# Altium PCB DSP_Control.PcbDoc (part 2 of 2)
Units mm, origin at the board's own origin, x right, y up, seen from the top; angles counter-clockwise.
Board outline 100 x 70 mm, 4 copper layers (Top Layer, GND, PWR, Bottom Layer), stack 0.603 mm thick; 225 components, 118 nets, 552 pads, 173 vias.
Unrouted connection lines stored in the file: 3.
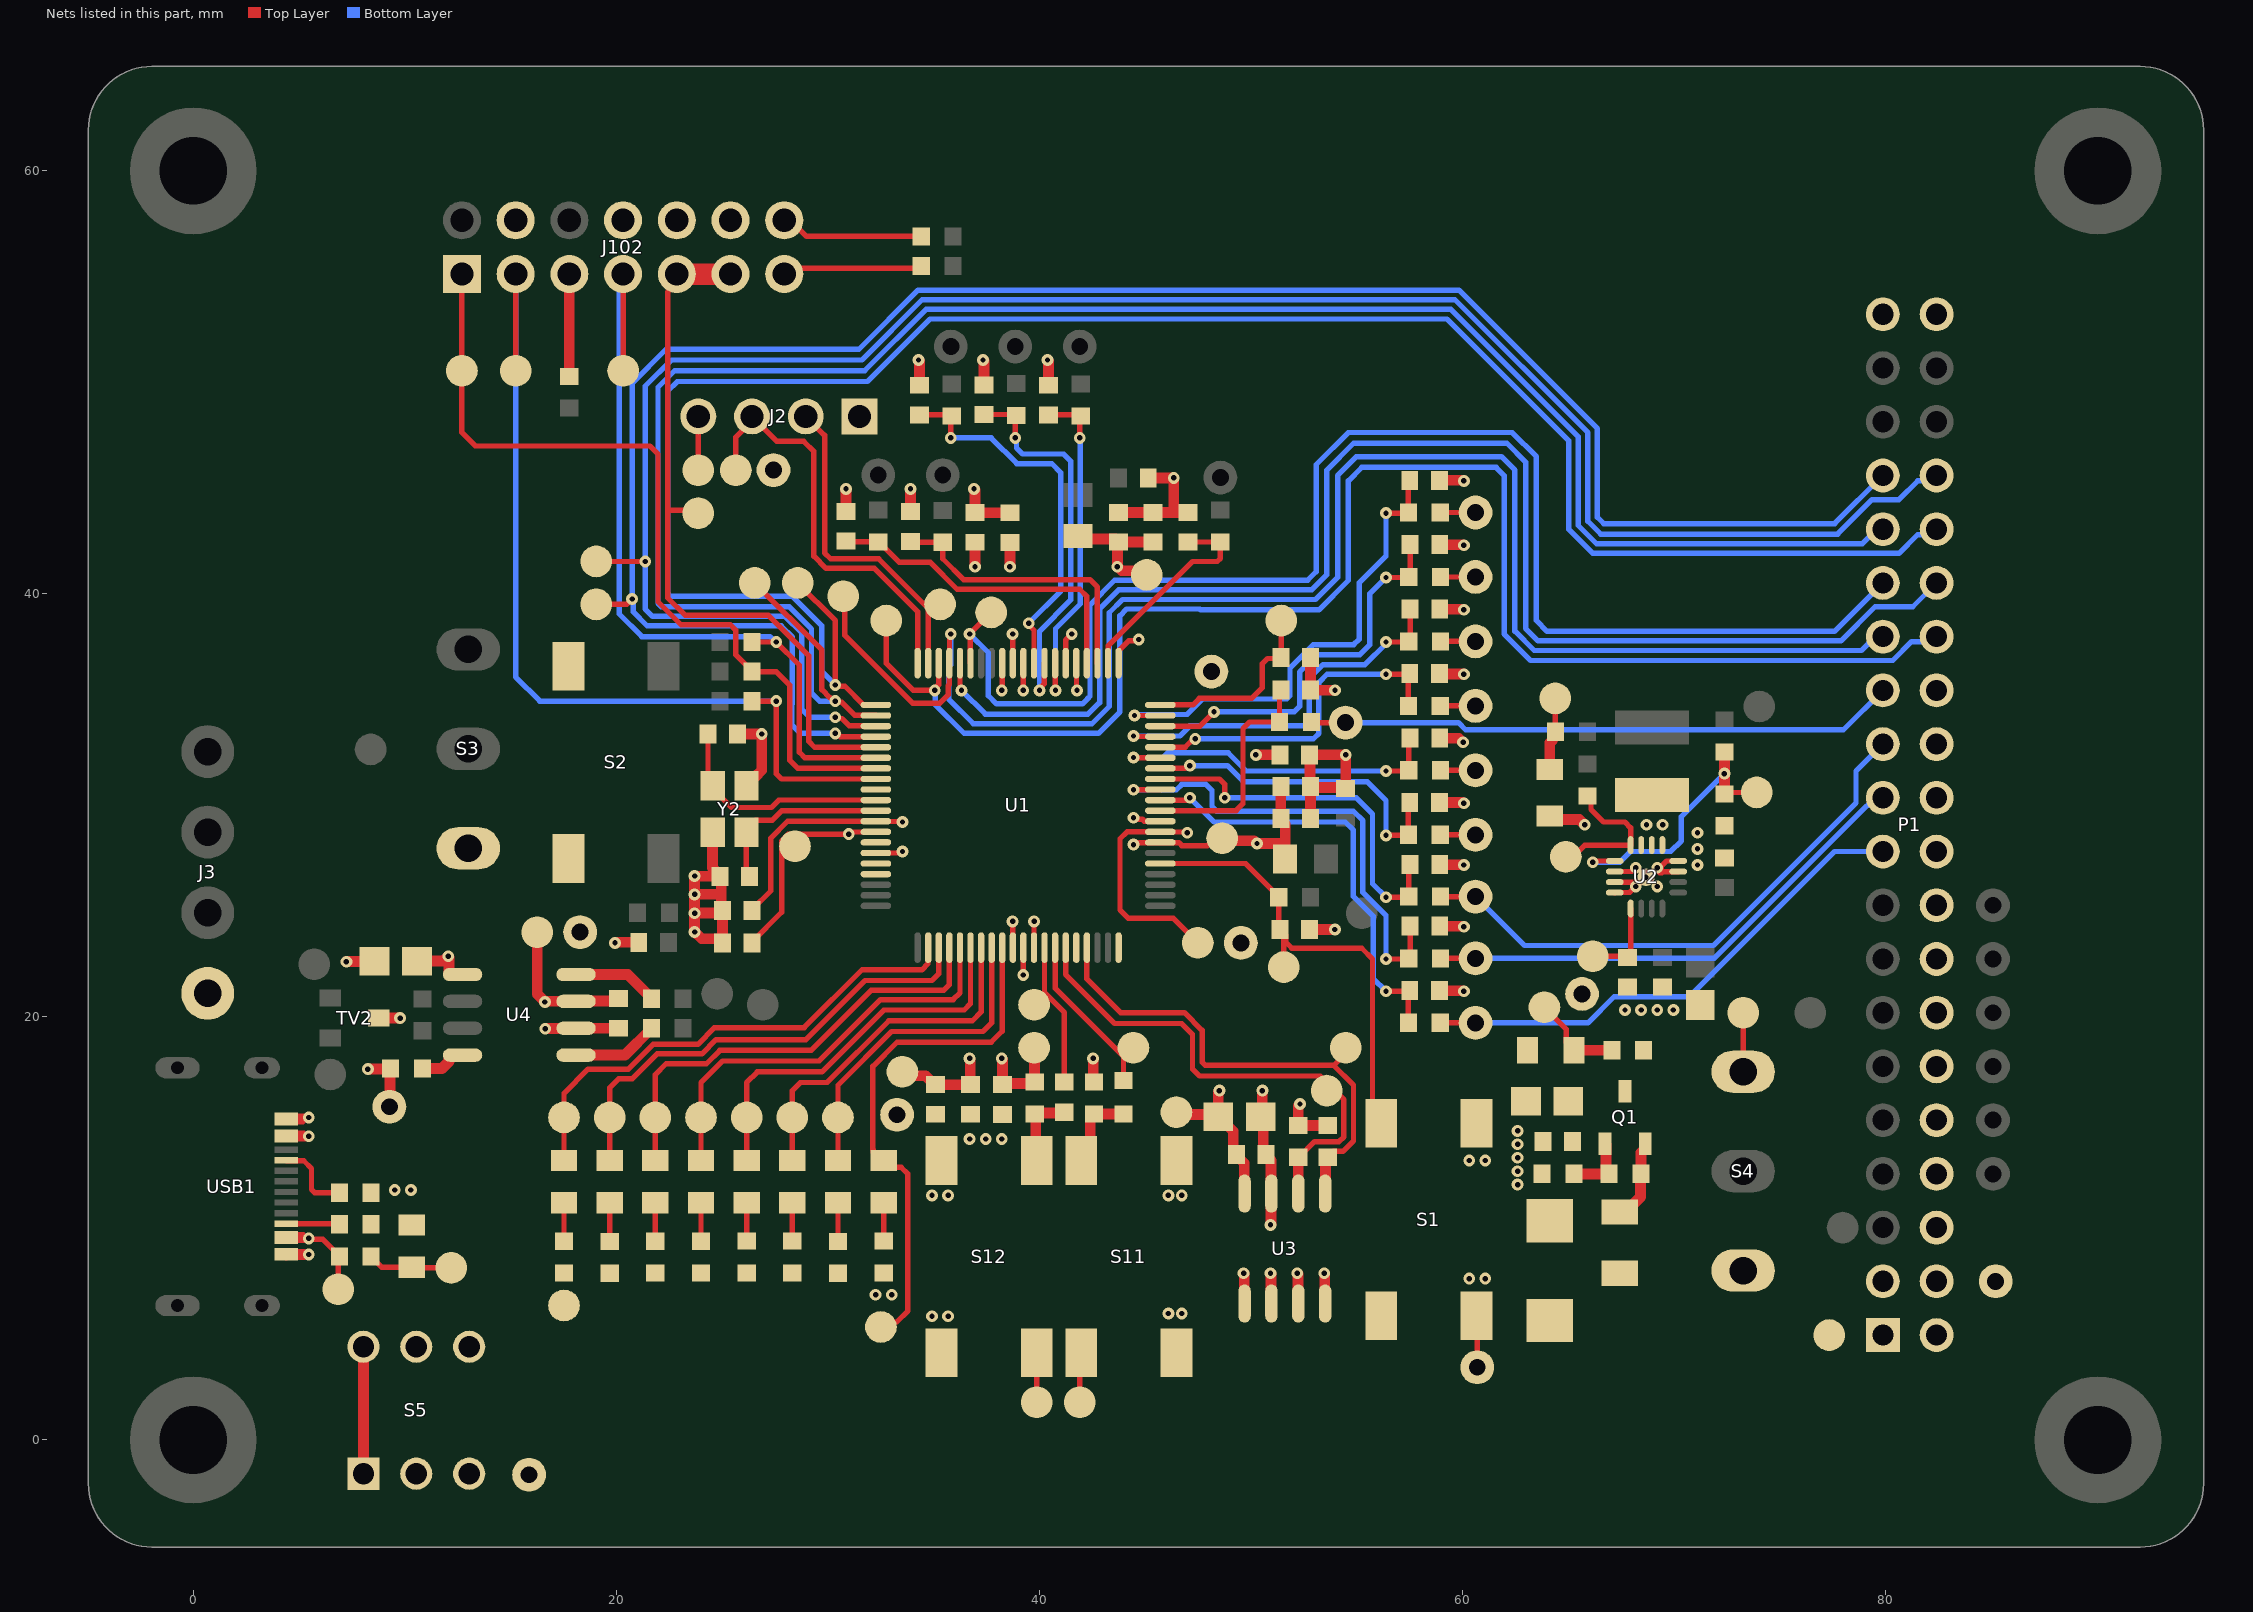
[diagram p4: the nets of this part, all layers, seen from the top]

## Via types
v1: diameter 0.559, hole 0.254, Top Layer to Bottom Layer, 173 vias

## Nets (pads, with @x,y where several pads share a name; then routed paths per layer and width w, separated by ;. In a path a pad name is that pad's centre, name@x,y a point inside that pad or via, vN(x,y) a via of type N, cw(c..) or ccw(c..) an arc to the next point about the centre after c; other vN are vias at no path point) (continued)
GND: C9.1 C10.1 C11.1 C12.1 C13.1 C14.2 C15.2 C16.2 C17.2 C18.2 C19.2 C20.2 C21.2 C22.2 C23.2 C24.2 C25.2 C26.2 C27.2 C28.2 C29.2 C30.2 C31.2 C32.2 C33.2 C34.2 C35.2 C36.2 C37.2 C38.2 C39.2 C40.2 C41.2 C42.2 C43.2 C44.2 C45.2 C46.1 C47.2 C48.2 C49.2 C50.2 C51.2 C52.2 C53.2 D2.1 D3.1 D4.1 J2.1 J3.1 J102.4 J102.8 J102.10 J102.12 P1.1 P1.2 P1.4 P1.6 P1.8 P1.10 P1.12 P1.14 P1.16 P1.18 P1.20 P1.22 P1.24 P1.26 P1.39 P1.40 R65.1 R72.2 R74.1 R87.2 R88.1 S1.1 S1.2 S2.3 S2.4 S3.3 S11.3 S11.4 S12.3 S12.4 TP9.1 TP16.1 TP25.1 TP97.1 TP104.1 TP153.1 TP157.1 TP158.1 TP159.1 TV1.2 TV2.3 U1.9 U1.21 U1.25 U1.30 U1.55 U1.70 U2.6 U2.7 U2.8 U2.15 U2.16 U2.17 U3.1 U3.2 U3.3 U3.4 U3.7 U4.2 USB1.A1 USB1.A12 USB1.B1 USB1.B12 Y2.2 Y2.4 | length 99.7
  Top Layer w0.254: USB1.A12@4.403,8.621 4.425,8.644 5.257,8.644 v1@5.382,8.768 ; USB1.B1@4.403,8.92 4.425,8.898 5.252,8.898 v1@5.382,8.768 ; USB1.B12@4.403,15.022 4.425,15.044 5.181,15.044 5.382,15.245 v1(5.464,15.245) 5.411,15.298 4.425,15.298 USB1.A1@4.403,15.321 ; v1(5.464,8.768) v1@5.382,8.768 ; U1.55@32.275,27.75 33.381,27.75 33.449,27.818 v1(33.531,27.818) ; v1(38.738,24.516) 38.744,24.51 38.744,23.281 U1.70@38.75,23.275 ; v1(39.246,35.438) 39.248,35.44 39.248,36.723 U1.30@39.25,36.725 ; U1.25@41.75,36.725 41.759,36.716 41.759,35.465 v1(41.786,35.438) ; U1.21@43.75,36.725 43.765,36.74 43.765,37.315 44.238,37.788 44.646,37.788 v1(44.704,37.846) ; v1(44.453,29.412) 44.511,29.353 44.872,29.353 44.967,29.259 45.716,29.259 U1.9@45.725,29.25 ; S1.2@60.673,5.87 60.709,5.834 TP153.1@60.709,3.434 ; U2.8@67.209,25.875 67.214,25.88 67.915,25.88 v1(68.202,26.167) 68.227,26.167 68.662,26.601 v1(68.687,26.601) ; U2.7@67.209,26.373 68.154,26.373 v1@68.202,26.421 ; U2.6@67.209,26.873 68.014,26.873 68.056,26.915 68.186,26.915 68.202,26.931 v1(68.202,27.056) ; U2.15@70.209,26.873 70.204,26.868 69.494,26.868 69.427,26.802 69.345,26.802 69.403,26.86 69.403,27.114 69.658,27.369 70.204,27.369 U2.16@70.209,27.373
  Top Layer w0.508: v1(7.242,22.611) 7.252,22.621 8.555,22.621 C50.2@8.573,22.639 ; v1(8.258,17.531) 8.268,17.541 R72.2@9.309,17.541 ; TV2.3@8.774,19.944 v1(9.782,19.944) ; TP97.1@9.274,15.753 9.301,15.78 9.301,17.532 R72.2@9.309,17.541 ; R72.2@9.328,17.559 R72.2@9.309,17.541 ; v1(16.64,19.436) 16.65,19.446 18.08,19.446 U4.2@18.098,19.464 C51.2@20.115,19.464 ; v1(19.942,23.5) 19.956,23.5 19.984,23.528 C43.2@21.065,23.528 ; Y2.2@24.554,28.722 24.554,27.05 24.907,26.697 24.865,26.654 23.71,26.654 v1(23.703,26.661) v1(23.703,25.793) ; C42.2@24.962,26.592 24.962,25.835 ; C11.1@25.019,23.5 25.018,23.501 C11.1@25.018,23.551 ; C41.2@25.738,33.378 v1(26.878,33.378) ; Y2.4@26.155,30.922 26.155,31.046 26.476,31.368 26.581,31.368 26.878,31.665 v1@26.878,33.364 ; C29.2@30.864,43.904 v1(30.864,44.963) ; C36.2@33.912,43.886 v1(33.912,44.963) ; v1(34.293,51.059) 34.293,51.045 34.339,50.999 C30.2@34.339,49.865 ; v1(36.914,44.967) 36.914,44.953 36.96,44.907 C21.2@36.96,43.84 36.961,43.839 38.61,43.839 C12.1@38.611,43.838 ; v1(37.341,51.059) 37.341,51.045 37.387,50.999 C37.2@37.387,49.883 ; v1(40.389,51.059) 40.389,51.045 40.435,50.999 C27.2@40.435,49.865 ; C15.2@43.737,43.851 C14.2@45.388,43.851 46.213,43.851 ; C16.2@45.154,45.471 45.161,45.478 46.351,45.478 v1(46.358,45.485) 46.358,43.995 46.213,43.851 ; C31.2@47.039,43.851 46.213,43.851 ; v1(49.66,7.879) 49.66,7.865 49.691,7.834 49.691,6.464 U3.1@49.706,6.449 ; v1(50.549,16.515) 50.539,16.505 50.539,15.339 C49.2@50.468,15.268 50.595,15.141 50.595,13.622 C48.2@50.722,13.495 50.722,13.445 50.961,13.207 U3.7@50.961,11.663 ; v1(50.93,10.165) 50.93,10.179 50.961,10.21 U3.7@50.961,11.663 ; v1(50.935,7.884) 50.935,7.87 50.961,7.844 50.961,6.464 U3.2@50.976,6.449 ; U3.7@50.976,11.648 U3.7@50.961,11.663 ; v1(52.2,7.879) 52.2,7.865 52.231,7.834 52.231,6.464 U3.3@52.246,6.449 ; C17.2@52.774,24.135 v1(53.978,24.135) ; C19.2@52.82,29.37 C20.2@52.82,30.894 ; C24.2@52.82,36.99 C28.2@52.82,35.466 52.837,35.449 53.97,35.449 v1(53.98,35.44) ; v1(53.47,7.879) 53.47,7.865 53.501,7.834 53.501,6.464 U3.4@53.516,6.449 ; C40.2@58.916,21.242 60.032,21.242 60.06,21.214 v1(60.074,21.214) ; C32.2@58.916,30.132 60.032,30.132 60.06,30.104 v1(60.074,30.104) ; C38.2@58.916,36.228 58.934,36.21 60.064,36.21 v1(60.074,36.2) ; C25.2@58.916,45.372 60.032,45.372 60.06,45.344 v1(60.074,45.344) ; C34.2@58.934,24.29 60.032,24.29 60.06,24.262 v1(60.074,24.262) ; C26.2@58.934,27.211 58.952,27.193 60.064,27.193 v1(60.074,27.183) ; C39.2@58.934,33.18 59.829,33.18 60.026,32.983 v1(60.039,32.983) ; C35.2@58.934,39.276 60.032,39.276 60.06,39.248 v1(60.074,39.248) ; C33.2@58.934,42.324 60.032,42.324 60.06,42.296 v1(60.074,42.296) ; D2.1@64.138,29.505 64.304,29.338 65.525,29.338 65.775,29.088 v1(65.789,29.088) ; v1(23.703,24.904) 23.713,24.914 24.907,24.914 C22.2@25.017,25.024 ; v1(23.703,24.904) v1(23.703,25.793) ; v1(23.703,24.904) v1(23.703,24.015) 23.717,24.015 24.037,23.696 24.873,23.696 C11.1@25.018,23.551 ; v1(23.703,25.793) 24.92,25.793 24.962,25.835 ; 24.962,25.835 24.962,25.079 C22.2@25.017,25.024 ; C22.2@25.017,25.024 25.018,25.023 C11.1@25.018,23.551 ; C20.2@52.82,30.894 52.865,30.85 54.442,30.85 C18.2@54.486,30.805 54.489,30.808 54.489,32.387 v1(54.493,32.39) C13.1@52.771,32.39 52.796,32.366 52.796,30.918 C20.2@52.82,30.894
  other v1: 34.928,5.847 35.69,5.847 46.104,5.974 46.739,5.974 60.328,7.625 61.09,7.625 34.928,11.562 35.69,11.562 46.104,11.562 46.739,11.562 9.528,11.816 10.29,11.816 62.614,12.07 62.614,12.705 60.328,13.213 61.09,13.213 62.614,13.34 62.614,13.975 36.706,14.229 37.468,14.229 38.23,14.229 62.614,14.61 67.694,20.325 68.456,20.325 69.218,20.325 69.98,20.325 69.218,26.167 69.218,27.056 71.123,27.183 71.123,27.945 71.123,28.707
GPIO0: LED1.1 TP145.1 U1.63 | length 22.5
  Top Layer w0.254: LED1.1@19.688,13.213 TP145.1@19.688,15.245 19.688,16.642 20.123,17.077 20.761,17.077 21.936,18.251 24.044,18.251 24.721,18.928 28.966,18.928 31.76,21.722 34.928,21.722 35.241,22.035 35.241,23.266 U1.63@35.25,23.275
GPIO1: LED0.1 TP144.1 U1.62 | length 23.7
  Top Layer w0.254: LED0.1@17.529,13.213 TP144.1@17.529,15.245 17.529,16.388 18.672,17.531 20.573,17.531 21.748,18.705 23.856,18.705 24.641,19.49 28.886,19.49 31.626,22.23 32.769,22.23 32.776,22.223 34.448,22.223 34.741,22.517 34.741,23.266 U1.62@34.75,23.275
GPIO5: R85.2 TP30.1 U1.74 | length 7.6
  Top Layer w0.254: U1.74@40.75,23.275 40.75,21.361 43.981,18.13 R85.2@43.981,16.998
GPIO6: U1.80
GPIO7: LED6.1 TP150.1 U1.68 | length 15.6
  Top Layer w0.254: LED6.1@30.483,13.213 TP150.1@30.483,15.245 30.483,16.769 33.023,19.309 37.341,19.309 37.75,19.718 U1.68@37.75,23.275
GPIO10: U1.76
GPIO11: P1.27 TP118.1 U1.37 | length 78.1
  Top Layer w0.254: TP118.1@30.737,39.883 30.81,39.81 30.81,38.032 34.01,34.832 35.306,34.832 35.695,35.221 35.695,35.666 35.75,35.721 U1.37@35.75,36.725 35.759,36.734 35.759,38.047 v1(35.817,38.105)
  Bottom Layer w0.254: v1(35.817,38.105) 35.817,36.654 35.719,36.555 35.719,35.028 36.887,33.86 42.494,33.86 43.31,34.676 43.31,39.107 43.94,39.737 53.063,39.737 54.105,40.779 54.105,45.598 54.994,46.487 61.852,46.487 62.487,45.852 62.487,38.239 63.402,37.324 78.87,37.324 79.524,37.978 P1.27@79.886,37.978
GPIO12: P1.30 U1.36 | length 68.3
  Top Layer w0.254: U1.36@36.25,36.725 36.25,35.595 36.325,35.52 v1(36.325,35.438)
  Bottom Layer w0.254: v1(36.325,35.438) 37.449,34.314 42.306,34.314 42.852,34.86 42.852,39.291 43.752,40.191 52.875,40.191 53.597,40.913 53.597,45.852 54.867,47.122 62.106,47.122 62.995,46.233 62.995,38.373 63.59,37.778 77.908,37.778 79.521,39.391 81.299,39.391 P1.30@82.426,40.518
GPIO13: P1.29 TP120.1 U1.35 | length 68.8
  Top Layer w0.254: U1.35@36.75,36.725 36.741,36.734 36.741,38.07 v1(36.706,38.105) TP120.1@37.722,39.121
  Bottom Layer w0.254: v1(36.706,38.105) 37.595,37.216 37.595,35.184 37.976,34.803 42.04,34.803 42.3,35.063 42.398,35.161 42.398,39.479 43.564,40.645 52.687,40.645 53.089,41.047 53.089,46.106 54.613,47.63 62.36,47.63 63.503,46.487 63.503,38.74 64.011,38.232 77.6,38.232 P1.29@79.886,40.518
GPIO18_X2: C41.1 U1.50 Y2.1 | length 10.9
  Top Layer w0.25: C41.1@24.338,33.378 24.338,31.138 Y2.1@24.554,30.922 24.554,30.797 25.254,30.097 25.254,30.087 25.445,29.897 27.335,29.897 27.687,30.25 U1.50@32.275,30.25
GPIO19_X1: C42.1 U1.51 Y2.3 | length 8.8
  Top Layer w0.254: C42.1@26.307,26.647 26.155,26.799 Y2.3@26.155,28.722 26.155,28.847 26.603,29.295 27.372,29.295 27.827,29.75 U1.51@32.275,29.75
GPIO22: LED5.1 TP149.1 U1.67 | length 16.8
  Top Layer w0.254: LED5.1@28.324,13.213 TP149.1@28.324,15.245 28.324,16.515 28.705,16.896 29.968,16.896 32.889,19.817 36.833,19.817 37.25,20.234 U1.67@37.25,23.275
GPIO23: LED3.1 TP147.1 U1.65 | length 20.2
  Top Layer w0.254: LED3.1@24.006,13.213 TP147.1@24.006,15.245 TP147.1@24.006,15.626 ; TP147.1@24.387,15.626 TP147.1@24.006,15.626 ; U1.65@36.25,23.275 36.25,21.139 35.925,20.814 32.496,20.814 29.594,17.912 25.029,17.912 24.006,16.889 TP147.1@24.006,15.626
GPIO32: U1.49
GPIO33: P1.28 TP119.1 U1.38 | length 74.1
  Top Layer w0.254: TP119.1@32.769,38.74 32.769,36.715 34.046,35.438 v1(35.055,35.438) 35.055,35.52 35.241,35.707 35.241,36.716 U1.38@35.25,36.725
  Bottom Layer w0.254: v1(35.055,35.438) 35.08,35.413 35.08,34.778 36.452,33.406 42.802,33.406 43.81,34.414 43.81,38.965 44.128,39.283 47.593,39.283 47.628,39.248 53.216,39.248 54.613,40.645 54.613,45.344 55.248,45.979 61.598,45.979 61.979,45.598 61.979,38.105 63.233,36.851 80.353,36.851 81.245,37.743 82.191,37.743 P1.28@82.426,37.978
GPIO35: J102.3 R58.1 TP13.1 U1.48 | length 45.8
  Top Layer w0.254: TP13.1@15.243,50.551 J102.3@15.243,55.123 ; R58.1@26.416,34.93 v1(27.562,34.93) 27.562,31.501 27.813,31.25 U1.48@32.275,31.25
  Bottom Layer w0.254: J102.3@15.243,55.123 15.243,36.073 16.386,34.93 v1(27.562,34.93)
GPIO37: J102.7 R59.1 TP14.1 U1.46 | length 39.2
  Top Layer w0.254: TP14.1@20.323,50.551 J102.7@20.323,55.123 ; R59.1@26.416,37.724 v1(27.562,37.724) 28.651,36.635 28.651,32.517 28.918,32.25 U1.46@32.275,32.25
  Bottom Layer w0.254: J102.7@20.323,55.123 20.142,54.942 20.142,39.048 21.212,37.978 27.261,37.978 27.515,37.724 v1(27.562,37.724)
GPIO39: U1.56
GPIO40: LED2.1 TP146.1 U1.64 | length 21.5
  Top Layer w0.254: LED2.1@21.847,13.213 TP146.1@21.847,15.245 21.847,17.277 22.355,17.785 24.26,17.785 24.895,18.42 29.213,18.42 32.061,21.268 35.49,21.268 35.75,21.528 U1.64@35.75,23.275
GPIO41: LED4.1 TP148.1 U1.66 | length 18.5
  Top Layer w0.254: LED4.1@26.165,13.213 TP148.1@26.165,15.245 26.165,16.896 26.673,17.404 29.728,17.404 32.649,20.325 36.452,20.325 36.75,20.623 U1.66@36.75,23.275
GPIO42: U1.57
GPIO43: U1.54
GPIO44: LED7.1 TP151.1 U1.69 | length 25
  Top Layer w0.254: TP151.1@32.515,5.339 32.753,5.577 33.261,5.577 33.785,6.101 33.785,12.578 33.474,12.889 32.966,12.889 LED7.1@32.642,13.213 32.518,13.213 32.144,13.586 32.144,13.725 32.134,13.735 32.134,17.658 33.277,18.801 37.722,18.801 38.25,19.329 U1.69@38.25,23.275
GPIO45: R86.1 TP31.1 U1.73 | length 7.6
  Top Layer w0.254: TP31.1@39.754,20.579 39.972,20.579 40.395,21.001 ; U1.73@40.25,23.275 40.25,21.146 40.395,21.001 ; R86.1@41.187,16.919 41.187,20.21 40.395,21.001
I2CB_SCL: R67.2 TP54.1 U1.75 U3.6 | length 23.9
  Top Layer w0.254: U1.75@41.25,23.275 41.25,22.004 43.564,19.69 46.732,19.69 47.247,19.175 47.247,17.531 47.574,17.204 53.282,17.204 53.842,16.644 54.402,16.084 54.402,14.33 54.174,14.102 53.013,14.102 52.274,13.363 R67.2@52.246,13.363
  Top Layer w0.508: U3.6@52.246,11.648 R67.2@52.246,13.363
I2CB_SDA: R68.2 TP55.1 U1.77 U3.5 | length 24.1
  Top Layer w0.254: U1.77@42.25,23.275 42.25,21.797 43.849,20.198 46.866,20.198 47.701,19.363 47.701,17.861 47.85,17.712 53.924,17.712 ; R68.2@53.643,13.363 53.92,13.64 54.354,13.64 54.856,14.142 54.856,16.78 53.924,17.712 ; TP55.1@54.486,18.547 54.486,18.274 53.924,17.712
  Top Layer w0.508: U3.5@53.516,11.648 53.531,11.663 53.531,13.251 R68.2@53.643,13.363
Iin_FB: P1.23 R14.2 TP39.1 | length 26.7
  Top Layer w0.254: R14.2@58.977,25.687 TP39.1@60.628,25.687
  Bottom Layer w0.254: TP39.1@60.628,25.687 62.942,23.373 71.871,23.373 78.616,30.118 78.616,31.628 P1.23@79.886,32.898
IL_FB: P1.19 R27.2 TP47.1 | length 24.3
  Top Layer w0.254: R27.2@58.959,19.718 TP47.1@60.628,19.718
  Bottom Layer w0.254: TP47.1@60.628,19.718 65.944,19.718 67.186,20.96 70.742,20.96 76.965,27.183 77.6,27.818 P1.19@79.886,27.818
MCU_TCK: J102.9 J102.11 TP15.1 U1.45 | length 34.7
  Top Layer w0.254: J102.9@22.863,55.123 22.863,54.704 22.428,54.269 22.428,43.947 ; TP15.1@23.879,43.82 23.752,43.947 22.428,43.947 ; U1.45@32.275,32.75 29.38,32.75 29.105,33.025 29.105,37.07 27.181,38.994 23.251,38.994 22.428,39.817 22.428,43.82 22.428,43.947
  Top Layer w1.016: J102.9@22.863,55.123 J102.11@25.403,55.123
MCU_TMS: J102.1 R10.1 TP12.1 U1.47 | length 40.5
  Top Layer w0.254: J102.1@12.703,55.123 12.703,47.63 13.338,46.995 21.593,46.995 21.974,46.614 21.974,39.629 23.063,38.54 25.392,38.54 25.641,38.291 25.641,38.121 25.657,38.105 25.657,37.114 26.416,36.355 R10.1@26.416,36.327 27.562,36.327 28.197,35.692 28.197,32.136 28.583,31.75 U1.47@32.275,31.75
NetC24_1: C24.1 TP34.1 U1.20 | length 9.1
  Top Layer w0.254: U1.20@45.725,34.75 47.266,34.75 47.573,35.057 50.041,35.057 50.549,35.565 50.549,36.708 50.788,36.947 51.378,36.947 C24.1@51.42,36.99 51.438,37.008 TP34.1@51.438,38.74
NetC25_1: C25.1 R12.1 U1.19 | length 23.2
  Top Layer w0.254: v1(44.501,34.247) 44.502,34.249 45.724,34.249 U1.19@45.725,34.25 ; v1(56.391,43.82) 57.425,43.82 R12.1@57.453,43.848 57.453,45.308 C25.1@57.516,45.372
  Bottom Layer w0.254: v1(44.501,34.247) 44.549,34.295 46.993,34.295 47.726,35.028 51.698,35.028 51.854,35.184 51.854,36.489 52.962,37.597 54.867,37.597 55.121,37.851 55.121,40.518 56.391,41.788 v1(56.391,43.82)
NetC26_1: C26.1 R14.1 U1.13 | length 17.9
  Top Layer w0.254: U1.13@45.725,31.25 48.514,31.25 48.771,30.993 v1(48.771,30.358) ; v1(56.391,25.659) 57.443,25.659 R14.1@57.471,25.687 57.471,27.147 C26.1@57.534,27.211
  Bottom Layer w0.254: v1(48.771,30.358) 54.994,30.358 55.756,29.596 55.756,26.294 v1(56.391,25.659)
NetC27_1: C27.1 R16.1 U1.27 | length 16.4
  Top Layer w0.254: C27.1@40.435,48.466 R16.1@41.913,48.466 ; U1.27@40.75,36.725 40.759,36.716 40.759,35.449 v1(40.77,35.438) ; v1(41.913,47.376) R16.1@41.913,48.465 ; R16.1@41.959,48.42 R16.1@41.913,48.466
  Bottom Layer w0.254: v1(40.77,35.438) 40.77,38.352 41.938,39.52 41.938,47.351 v1(41.913,47.376)
NetC28_1: C28.1 R18.1 U1.10 | length 11
  Top Layer w0.254: U1.10@45.725,29.75 49.306,29.75 49.635,30.079 49.635,33.635 49.942,33.942 R18.1@51.357,33.942 51.357,35.402 C28.1@51.42,35.466
NetC29_1: C29.1 R20.1 U1.24 | length 15.6
  Top Layer w0.254: C29.1@30.864,42.504 30.91,42.459 R20.1@32.388,42.459 32.416,42.459 33.386,41.489 34.848,41.489 36.117,40.22 41.913,40.22 42.25,39.883 U1.24@42.25,36.725
NetC30_1: C30.1 R22.1 U1.29 | length 18.3
  Top Layer w0.254: C30.1@34.339,48.466 R22.1@35.817,48.466 ; v1(35.817,47.376) R22.1@35.817,48.465 ; R22.1@35.863,48.42 R22.1@35.817,48.466 ; v1(39.5,38.613) 39.5,38.531 39.75,38.281 U1.29@39.75,36.725
  Bottom Layer w0.254: v1(35.817,47.376) 37.722,47.376 38.938,46.16 40.589,46.16 41.024,45.725 41.024,40.137 v1(39.5,38.613)
NetC31_1: C31.1 R24.1 U1.22 | length 10.1
  Top Layer w0.254: U1.22@43.25,36.725 43.259,36.734 43.259,37.544 47.249,41.534 48.414,41.534 48.563,41.683 R24.1@48.563,42.451 C31.1@47.039,42.451
NetC32_1: C32.1 R26.1 U1.14 | length 15.7
  Top Layer w0.254: U1.14@45.725,31.75 46.906,31.75 47.038,31.882 v1(47.12,31.882) ; v1(56.391,28.58) 57.425,28.58 R26.1@57.453,28.608 57.453,30.068 C32.1@57.516,30.132
  Bottom Layer w0.254: v1(47.12,31.882) 48.891,31.882 49.653,31.12 55.502,31.12 56.391,30.231 v1(56.391,28.58)
NetC33_1: C33.1 R13.1 U1.18 | length 18.6
  Top Layer w0.254: U1.18@45.725,33.75 47.591,33.75 v1(48.263,34.422) ; v1(56.391,40.772) 57.443,40.772 R13.1@57.471,40.8 57.534,40.863 C33.1@57.534,42.324
  Bottom Layer w0.254: v1(48.263,34.422) 52.054,34.422 52.308,34.676 52.308,36.301 53.131,37.124 55.156,37.124 55.629,37.597 55.629,40.01 v1(56.391,40.772)
NetC34_1: C34.1 R15.1 U1.12 | length 23
  Top Layer w0.254: v1(44.453,30.739) 44.458,30.744 45.719,30.744 U1.12@45.725,30.75 ; v1(56.391,22.738) 57.443,22.738 R15.1@57.471,22.766 57.534,22.829 C34.1@57.534,24.29
  Bottom Layer w0.254: v1(44.453,30.739) 46.485,30.739 46.739,30.993 47.882,30.993 48.165,30.71 48.165,29.955 48.397,29.723 54.855,29.723 55.302,29.276 55.302,25.89 56.391,24.801 v1(56.391,22.738)
NetC35_1: C35.1 R17.1 U1.17 | length 18.9
  Top Layer w0.254: v1(44.453,33.279) 44.473,33.259 45.716,33.259 U1.17@45.725,33.25 ; v1(56.391,37.724) 57.443,37.724 R17.1@57.471,37.752 57.534,37.815 C35.1@57.534,39.276
  Bottom Layer w0.254: v1(44.453,33.279) 46.643,33.279 47.123,33.758 52.552,33.758 52.762,33.968 52.762,36 53.416,36.654 55.403,36.654 56.391,37.642 v1(56.391,37.724)
NetC36_1: C36.1 R19.1 U1.23 | length 13.8
  Top Layer w0.254: C36.1@33.912,42.486 33.958,42.441 R19.1@35.436,42.441 35.436,41.661 36.423,40.674 42.392,40.674 42.75,40.316 U1.23@42.75,36.725
NetC37_1: C37.1 R21.1 U1.28 | length 18.8
  Top Layer w0.254: C37.1@37.387,48.483 R21.1@38.865,48.483 ; v1(38.865,47.376) R21.1@38.865,48.483 ; R21.1@38.911,48.438 R21.1@38.865,48.483 ; v1(40.008,35.438) 40.008,35.52 40.241,35.754 40.241,36.716 U1.28@40.25,36.725
  Bottom Layer w0.254: v1(38.865,47.376) 38.923,47.318 38.923,46.907 39.217,46.614 41.151,46.614 41.484,46.281 41.484,39.708 40.008,38.232 v1(40.008,35.438)
NetC38_1: C38.1 R23.1 U1.16 | length 16.2
  Top Layer w0.254: U1.16@45.725,32.75 46.898,32.75 47.292,33.144 v1(47.374,33.144) ; v1(56.391,36.2) C38.1@57.488,36.2 ; R23.1@57.453,34.704 57.453,36.164 C38.1@57.488,36.2 ; C38.1@57.516,36.228 C38.1@57.488,36.2
  Bottom Layer w0.254: v1(47.374,33.144) 47.382,33.152 52.962,33.152 53.216,33.406 53.216,35.812 53.604,36.2 v1(56.391,36.2)
NetC39_1: C39.1 R25.1 U1.15 | length 16.3
  Top Layer w0.254: v1(44.453,32.263) 44.459,32.256 45.718,32.256 U1.15@45.725,32.25 ; v1(56.391,31.628) 57.443,31.628 R25.1@57.471,31.656 57.471,33.116 C39.1@57.534,33.18
  Bottom Layer w0.254: v1(44.453,32.263) 45.841,32.263 46.066,32.488 48.927,32.488 49.787,31.628 v1(56.391,31.628)
NetC40_1: C40.1 R27.1 U1.11 | length 20.7
  Top Layer w0.254: U1.11@45.725,30.25 46.93,30.25 47.038,30.358 v1(47.12,30.358) ; v1(56.391,21.214) C40.1@57.488,21.214 ; R27.1@57.453,19.718 57.453,21.178 C40.1@57.488,21.214 ; C40.1@57.516,21.242 C40.1@57.488,21.214
  Bottom Layer w0.254: v1(47.12,30.358) 48.263,29.215 54.467,29.215 54.848,28.834 54.848,25.702 55.785,24.766 55.785,21.82 v1(56.391,21.214)
NetC46_2: C46.2 TP132.1 U2.9 | length 4
  Top Layer w0.254: TP132.1@66.17,22.865 67.77,22.865 C46.2@67.821,22.814 67.961,22.954 U2.9@67.961,25.123
NetD2_2: D2.2 R69.1 TP135.1 | length 3.5
  Top Layer w0.254: R69.1@64.26,33.332 64.392,33.464 TP135.1@64.392,35.057
  Top Layer w0.508: D2.2@64.138,31.704 64.138,32.967 64.26,33.088 R69.1@64.26,33.332 ; R69.1@64.392,33.464 R69.1@64.41,33.482
NetD3_2: D3.2 R89.1 TP128.1 | length 4.4
  Top Layer w0.254: TP128.1@63.884,20.452 64.908,19.428 64.908,18.793 D3.2@65.281,18.42
  Top Layer w0.508: D3.2@65.281,18.42 R89.1@67.069,18.42
NetD4_2: D4.2 R90.1 TP127.1 | length 4
  Top Layer w0.254: R90.1@8.413,8.669 8.413,8.641 8.69,8.364 8.718,8.364 8.921,8.161 D4.2@10.336,8.161 10.364,8.133 TP127.1@12.195,8.133
NetF1_2: F1.2 Q1.2 R91.2 | length 3.9
  Top Layer w0.508: F1.2@67.44,10.77 67.708,10.77 68.421,11.483 R91.2@68.421,12.551 ; R91.2@68.448,12.578 68.448,13.58 68.644,13.776 Q1.2@68.644,14.011
NetJ102_5: J102.5 R60.1 | length 4.8
  Top Layer w0.508: R60.1@17.783,50.287 J102.5@17.783,55.123
NetJ102_13: J102.13 R61.1 | length 6.6
  Top Layer w0.254: J102.13@27.943,55.123 28.208,55.388 34.304,55.388 R61.1@34.42,55.504
NetJ102_14: J102.14 R62.2 | length 6.8
  Top Layer w0.254: J102.14@27.943,57.663 28.231,57.663 28.993,56.901 R62.2@34.42,56.901
NetL4_1: L4.1 U2.1 U2.2 U2.3
  other v1: 68.71,29.088 69.472,29.088
NetLED0_2: LED0.2 R75.1 | length 1.8
  Top Layer w0.254: R75.1@17.529,9.393 LED0.2@17.529,11.214
NetLED1_2: LED1.2 R76.1 | length 1.8
  Top Layer w0.254: R76.1@19.688,9.385 LED1.2@19.688,11.214
NetLED2_2: LED2.2 R77.1 | length 1.8
  Top Layer w0.254: R77.1@21.847,9.393 LED2.2@21.847,11.214
NetLED3_2: LED3.2 R78.1 | length 1.8
  Top Layer w0.254: R78.1@24.006,9.393 LED3.2@24.006,11.214
NetLED4_2: LED4.2 R79.1 | length 1.8
  Top Layer w0.254: R79.1@26.165,9.403 LED4.2@26.165,11.214
NetLED5_2: LED5.2 R80.1 | length 1.8
  Top Layer w0.254: R80.1@28.324,9.403 LED5.2@28.324,11.214
NetLED6_2: LED6.2 R81.1 | length 1.8
  Top Layer w0.254: R81.1@30.483,9.385 LED6.2@30.483,11.214
NetLED7_2: LED7.2 R82.1 | length 1.8
  Top Layer w0.254: R82.1@32.642,9.403 LED7.2@32.642,11.214
NetQ1_1: Q1.1 R74.2 R91.1 | length 3.2
  Top Layer w0.508: R74.2@65.273,12.578 R91.1@66.942,12.578 66.942,12.606 66.79,12.758 66.79,13.965 Q1.1@66.744,14.011
NetR12_2: R12.2 TP38.1 | length 1.7
  Top Layer w0.254: R12.2@58.959,43.848 TP38.1@60.628,43.848
NetR13_2: R13.2 TP37.1 | length 1.7
  Top Layer w0.254: R13.2@58.977,40.8 TP37.1@60.628,40.8
NetR17_2: R17.2 TP51.1 | length 1.7
  Top Layer w0.254: R17.2@58.977,37.752 TP51.1@60.628,37.752
NetR23_2: R23.2 TP50.1 | length 1.7
  Top Layer w0.254: R23.2@58.959,34.704 TP50.1@60.628,34.704
NetR25_2: R25.2 TP49.1 | length 1.7
  Top Layer w0.254: R25.2@58.977,31.656 TP49.1@60.628,31.656
NetR26_2: R26.2 TP41.1 | length 1.7
  Top Layer w0.254: R26.2@58.959,28.608 TP41.1@60.628,28.608
NetR64_1: R64.1 TP133.1 U2.4 | length 7.1
  Top Layer w0.254: TP133.1@64.9,27.564 65.237,27.564 65.796,28.123 U2.4@67.961,28.123 67.961,28.939 67.685,29.215 66.678,29.215 66.085,29.808 66.085,30.276 R64.1@65.916,30.444
NetR65_2: R65.2 R66.1 TP134.1 U2.5 | length 13.2
  Top Layer w0.254: v1(66.17,27.31) 66.252,27.31 66.316,27.373 U2.5@67.209,27.373 ; R65.2@72.393,30.543 72.462,30.612 TP134.1@73.917,30.612
  Top Layer w0.508: R65.2@72.393,30.543 v1(72.393,31.501) R66.1@72.393,32.527
  Bottom Layer w0.254: v1(66.17,27.31) 67.44,27.31 67.948,27.818 69.853,27.818 70.361,28.326 70.361,29.469 v1(72.393,31.501)
NetR70_1: R70.1 U4.4 | length 4
  Top Layer w0.508: U4.4@18.098,22.004 20.542,22.004 21.657,20.889 R70.1@21.657,20.861
NetR71_1: R71.1 U4.1 | length 4.1
  Top Layer w0.508: U4.1@18.098,18.194 20.415,18.194 21.657,19.436 R71.1@21.657,19.464
NetR72_1: R72.1 U4.8 | length 2.3
  Top Layer w0.508: R72.1@10.834,17.559 11.763,17.559 12.093,17.89 12.093,18.138 12.15,18.194 U4.8@12.734,18.194
NetR83_1: R83.1 R85.1 S11.1 S11.2 TP29.1 | length 6.2
  Top Layer w0.254: TP29.1@41.913,1.783 41.913,4.044 S11.1@41.984,4.115
  Top Layer w0.508: S11.2@41.984,13.213 42.406,13.635 42.406,15.263 42.556,15.413 R83.1@42.584,15.413 R85.1@43.981,15.413
NetR84_1: R84.1 R86.2 S12.1 S12.2 TP32.1 | length 6
  Top Layer w0.254: TP32.1@39.881,1.783 S12.2@39.881,4.115
  Top Layer w0.508: S12.1@39.881,13.213 39.835,13.259 39.835,15.367 R84.1@39.79,15.413 39.829,15.452 41.147,15.452 R86.2@41.187,15.491
NetR87_1: R87.1 USB1.A5 | length 3.7
  Top Layer w0.254: USB1.A5@4.403,13.221 4.425,13.198 5.225,13.198 5.593,12.83 5.593,11.838 5.742,11.689 R87.1@6.907,11.689
NetR88_2: R88.2 USB1.B5 | length 2.5
  Top Layer w0.254: USB1.B5@4.403,10.221 6.879,10.221 R88.2@6.907,10.193
NetS4_3: S4.3 S5.3 S5.6 TP155.1
NetS5_1: S5.1 S5.4 | length 6
  Top Layer w0.508: S5.1@8.045,-1.598 S5.4@8.045,4.404
SCIA_RX: J2.3 TP27.1 U1.40 | length 19.8
  Top Layer w0.254: TP27.1@25.657,45.852 25.657,47.414 26.419,48.176 J2.3@26.419,48.392 27.596,47.215 28.866,47.215 29.34,46.741 29.34,41.788 29.921,41.207 32.207,41.207 34.25,39.164 U1.40@34.25,36.725
SCIA_TX: J2.2 TP26.1 U1.39 | length 16
  Top Layer w0.254: J2.2@28.959,48.392 29.856,47.495 29.856,41.936 30.131,41.661 32.408,41.661 TP26.1@34.75,39.319 ; U1.39@34.75,36.725 TP26.1@34.75,39.319 ; TP26.1@35.309,39.502 35.126,39.319 TP26.1@34.75,39.319
SPIB_CLK: P1.34 TP124.1 U1.43 | length 99.1
  Top Layer w0.254: TP124.1@19.053,41.534 v1(21.368,41.534) ; v1(30.356,34.168) 30.414,34.11 30.668,34.11 31.019,33.759 32.266,33.759 U1.43@32.275,33.75
  Bottom Layer w0.254: v1(21.368,41.534) 21.368,39.292 21.72,38.94 27.983,38.94 28.778,38.145 28.778,34.534 29.144,34.168 v1(30.356,34.168) ; v1@21.466,41.534 21.368,41.632 21.368,49.818 22.609,51.059 31.612,51.059 34.46,53.907 59.653,53.907 65.935,47.625 65.935,43.434 66.546,42.823 77.746,42.823 79.378,44.455 80.648,44.455 81.533,45.34 82.168,45.34 P1.34@82.426,45.598
SPIB_SIMO: P1.32 TP122.1 U1.41 | length 97.3
  Top Layer w0.254: TP122.1@28.578,40.518 30.356,38.74 v1(30.356,35.692) 30.414,35.634 30.816,35.634 31.7,34.75 U1.41@32.275,34.75
  Bottom Layer w0.254: v1(30.356,35.692) 29.721,36.327 29.721,38.486 28.324,39.883 22.577,39.883 22.428,40.032 22.428,49.582 22.889,50.043 31.88,50.043 34.836,52.999 59.277,52.999 65.027,47.249 65.027,43.058 66.17,41.915 80.648,41.915 81.533,42.8 82.168,42.8 P1.32@82.426,43.058
SPIB_SOMI: P1.31 TP123.1 U1.42 | length 98.5
  Top Layer w0.254: TP123.1@26.546,40.518 29.721,37.343 29.721,35.469 30.105,35.086 30.118,35.086 30.274,34.93 v1(30.356,34.93) 30.414,34.872 30.668,34.872 31.281,34.259 32.266,34.259 U1.42@32.275,34.25
  Bottom Layer w0.254: v1(30.356,34.93) 29.613,34.93 29.232,35.311 29.232,38.333 28.171,39.394 22.123,39.394 21.974,39.543 21.974,49.77 22.755,50.551 31.746,50.551 34.648,53.453 59.465,53.453 65.481,47.437 65.481,43.246 66.358,42.369 78.905,42.369 79.594,43.058 P1.31@79.886,43.058
SPIB_STE: P1.33 TP125.1 U1.44 | length 97.9
  Top Layer w0.254: TP125.1@19.053,39.502 20.495,39.502 v1(20.749,39.756) ; v1(30.356,33.406) 30.438,33.406 30.594,33.25 U1.44@32.275,33.25
  Bottom Layer w0.254: v1(30.356,33.406) 28.714,33.406 28.309,33.811 28.309,34.788 28.324,34.803 28.324,37.957 27.795,38.486 21.466,38.486 20.807,39.145 20.807,39.698 v1(20.749,39.756) 20.761,39.769 20.761,49.973 22.355,51.567 31.478,51.567 34.272,54.361 59.841,54.361 66.389,47.813 66.389,43.622 66.689,43.323 77.604,43.323 79.879,45.598 P1.33@79.886,45.598
VBUS: R90.2 S5.2 S5.5 TP154.1 USB1.A4 USB1.A9 USB1.B4 USB1.B9 | length 7.7
  Top Layer w0.254: USB1.A9@4.403,9.421 4.425,9.444 5.295,9.444 v1@5.382,9.53 ; USB1.B4@4.403,9.721 4.425,9.698 5.214,9.698 v1@5.382,9.53 ; USB1.B9@4.403,14.221 4.425,14.244 5.27,14.244 v1@5.382,14.356 ; USB1.A4@4.403,14.521 4.425,14.498 5.239,14.498 v1@5.382,14.356 ; v1(5.464,14.356) v1@5.382,14.356 ; TP154.1@6.861,7.117 6.861,8.651 R90.2@6.907,8.697 ; R90.2@6.907,8.669 R90.2@6.907,8.697 ; v1@5.382,9.53 v1(5.464,9.53) 5.514,9.48 6.124,9.48 R90.2@6.907,8.697
VDD: C9.2 C10.2 C11.2 C12.2 C13.2 TP10.1 TP164.1 TP166.1 U1.8 U1.31 U1.53 U1.71 | length 30.7
  Top Layer w0.254: C11.2@26.419,23.5 26.419,23.55 27.816,24.947 27.816,28.319 28.141,28.644 v1(30.991,28.644) 31.073,28.644 31.171,28.741 32.266,28.741 U1.53@32.275,28.75 ; v1(38.738,38.105) 38.744,38.099 38.744,36.731 U1.31@38.75,36.725 ; v1(39.24,21.982) 39.245,21.987 39.245,23.27 U1.71@39.25,23.275 ; v1(46.993,28.707) 46.959,28.741 45.734,28.741 U1.8@45.725,28.75 44.146,28.75 43.818,28.422 43.818,25.055 44.202,24.672 46.329,24.672 TP166.1@47.501,23.5
  Top Layer w0.508: TP164.1@33.531,17.404 33.721,17.214 34.624,17.214 35.041,16.797 C9.2@35.091,16.797 C10.2@36.742,16.797 36.742,17.99 36.706,18.025 v1(36.706,18.039) ; v1(38.611,41.28) C12.2@38.611,42.438 ; v1(50.242,32.39) C13.2@51.372,32.39
VDDA: C14.1 C15.1 L2.1 TP11.1 U1.26 | length 7.9
  Top Layer w0.254: U1.26@41.25,36.725 41.25,37.815 41.532,38.097 v1(41.532,38.105) ; L2.1@41.71,42.738 L2.1@41.832,42.738
  Top Layer w0.508: L2.1@41.832,42.738 41.976,42.595 43.593,42.595 43.701,42.487 C15.1@43.701,42.451 ; TP11.1@44.961,40.899 44.771,41.089 43.896,41.089 43.705,41.28 v1(43.691,41.28) 43.701,41.29 C15.1@43.701,42.451 ; C14.1@45.388,42.451 C15.1@43.737,42.451 C15.1@43.701,42.451
VDDIO: C19.1 C20.1 C21.1 C22.1 C23.1 C48.1 C49.1 C50.1 C51.1 J2.4 L3.2 R67.1 R68.1 R75.2 R76.2 R77.2 R78.2 R79.2 R80.2 R81.2 R82.2 R83.2 R84.2 TP8.1 TP100.1 TP152.1 TP160.1 TP161.1 TP162.1 U1.7 U1.32 U1.52 U1.72 U3.8 U4.3 U4.5 | length 53
  Top Layer w0.254: TP161.1@23.879,45.852 J2.4@23.879,48.392 ; C22.1@26.416,25.024 26.416,25.074 27.308,25.965 27.308,28.453 28.105,29.25 U1.52@32.275,29.25 32.284,29.241 33.505,29.241 v1(33.531,29.215) ; C21.1@36.96,42.441 C21.1@37.01,42.441 ; v1(38.23,35.438) 38.241,35.449 38.241,36.716 U1.32@38.25,36.725 ; U1.72@39.75,23.275 39.752,23.277 39.752,24.514 v1(39.754,24.516) ; R83.2@42.548,16.954 R83.2@42.584,16.919 ; v1(44.453,28.144) 44.535,28.144 44.633,28.241 45.716,28.241 U1.7@45.725,28.25 45.734,28.241 46.601,28.241 46.742,28.101 47.954,28.101 48.307,28.453 TP162.1@48.644,28.453
  Top Layer w0.508: C50.1@10.575,22.639 11.815,22.639 12.041,22.865 v1(12.054,22.865) 12.054,22.851 12.093,22.812 12.093,22.06 12.15,22.004 U4.5@12.734,22.004 ; TP8.1@16.259,24.008 16.259,21.087 16.626,20.72 v1(16.626,20.706) 16.64,20.706 16.668,20.734 U4.3@18.098,20.734 18.122,20.757 20.009,20.757 C51.1@20.115,20.864 ; v1(36.96,41.28) C21.1@36.96,42.441 ; v1(38.23,18.039) 38.23,18.025 38.266,17.99 C23.1@38.266,16.794 38.328,16.857 39.727,16.857 R84.2@39.79,16.919 39.772,16.937 39.772,18.529 TP160.1@39.754,18.547 ; R83.2@42.548,16.954 v1(42.548,18.039) ; TP100.1@46.485,15.499 46.601,15.383 48.351,15.383 C49.1@48.466,15.268 ; v1(48.517,16.515) 48.517,16.501 48.466,16.451 C49.1@48.466,15.268 ; TP162.1@48.644,28.453 48.773,28.324 50.156,28.324 50.281,28.199 v1(50.295,28.199) 51.539,28.199 51.629,28.289 ; U3.8@49.706,11.648 49.691,11.663 49.691,13.077 49.322,13.445 C48.1@49.322,13.495 49.176,13.641 49.176,14.588 48.497,15.268 C49.1@48.466,15.268 ; C19.1@51.42,29.37 C20.1@51.42,30.894 ; L3.2@51.629,27.465 51.629,28.289 ; C19.1@51.629,29.112 51.629,28.289 ; v1(52.327,15.88) 52.327,15.866 52.246,15.785 R67.1@52.246,14.869 R68.1@53.643,14.869
  other v1: 32.261,6.863 33.023,6.863
Vin: F1.1 P1.3 TP129.1 TV1.1
Vin-af: C52.1 C53.1 Q1.3 R89.2 S4.1 TP131.1 | length 2.8
  Top Layer w0.254: S4.1@73.282,17.407 TP131.1@73.282,20.198
Vin_FB: P1.21 R15.2 TP40.1 | length 24.1
  Top Layer w0.254: R15.2@58.977,22.766 TP40.1@60.628,22.766
  Bottom Layer w0.254: TP40.1@60.628,22.766 71.906,22.766 79.111,29.971 79.135,29.971 79.522,30.358 P1.21@79.886,30.358
Vo_FB: P1.25 R18.2 TP42.1 | length 27.9
  Top Layer w0.254: R18.2@52.863,33.942 52.891,33.914 TP42.1@54.486,33.914
  Bottom Layer w0.254: TP42.1@54.486,33.914 59.824,33.914 60.161,33.577 78.025,33.577 P1.25@79.886,35.438
XRSn: C17.1 R11.1 S1.3 S1.4 TP167.1 U1.5 | length 22.5
  Top Layer w0.254: U1.5@45.725,27.25 49.758,27.25 51.321,25.687 R11.1@51.321,25.659 51.321,24.188 C17.1@51.374,24.135 C17.1@51.565,23.944 ; TP167.1@51.565,22.357 C17.1@51.565,23.944 ; S1.3@56.173,14.968 55.756,15.385 55.756,22.738 55.248,23.246 51.946,23.246 51.648,23.544 51.648,23.862 C17.1@51.565,23.944
pads on no net: A1.1 A2.1 A3.1 A4.1 J3.4 J102.2 J102.6 P1.35 P1.36 P1.37 P1.38 S3.1 U1.6 U1.33 U1.34 U1.58 USB1.A6 USB1.A7 USB1.A8 USB1.B6 USB1.B7 USB1.B8

## Polygon pours and split planes (outlines as drawn)
GND on Top Layer "GND_L01_P053" (solid, pour order 53): 35.941,33.02 42.291,33.02 42.291,26.67 35.941,26.67
GND on Top Layer "GND_L01_P052" (solid, pour order 52): 46.485,14.356 46.48,14.351 43.561,14.351 43.18,13.97 43.18,3.302 43.561,2.921 43.566,2.926 46.741,2.926 47.244,3.429 47.244,13.589
GND on Top Layer "GND_L01_P051" (solid, pour order 51): 35.372,2.926 35.377,2.921 38.481,2.921 38.862,3.302 38.862,15.494 38.476,15.88 34.93,15.88 34.544,15.494 34.544,3.81
GND on Top Layer "GND_L01_P050" (solid, pour order 50): 17.018,37.465 17.272,37.719 20.828,37.719 21.082,37.465 21.082,26.543 20.828,26.289 20.823,26.294 11.814,26.294 11.43,26.678 11.43,30.734 11.938,31.242 16.764,31.242 17.018,31.496
GND on Top Layer "GND_L01_P049" (solid, pour order 49): 12.7,9.652 12.954,9.906 12.954,14.351 12.827,14.478 8.128,14.478 8.001,14.351 8.004,14.348 8.004,9.903 8.255,9.652
Vin on Top Layer "VIN_L01_P000" (solid, pour order 0): 62.995,3.688 79.378,3.688 80.775,5.085 80.775,7.879 80.14,8.514 63.63,8.514 62.995,7.879
+12V on Top Layer "+12V_L01_P024" (solid, pour order 24): 75.441,13.975 75.441,21.595 75.06,21.976 70.488,21.976 70.488,24.135 70.996,24.643 77.981,24.643 77.981,11.943 77.219,11.181 71.377,11.181 71.377,13.975
ENABLE on Top Layer "ENABLE_L01_P020" (solid, pour order 20): 21.466,37.724 22.99,37.724 22.99,26.294 21.466,26.294
NetR83_1 on Top Layer "NETR83_1_L01_P011" (solid, pour order 11): 41.278,14.382 42.802,14.382 42.802,2.952 41.278,2.952
NetR84_1 on Top Layer "NETR84_1_L01_P013" (solid, pour order 13): 39.119,14.483 40.643,14.483 40.643,3.053 39.119,3.053
VDDIO on Top Layer "VDDIO_L01_P016" (solid, pour order 16): 17.148,8.26 33.404,8.26 33.404,6.355 17.148,6.355
GND on Top Layer "GND_L01_P010" (solid, pour order 10): 59.82,16.261 63.122,16.261 63.122,9.657 61.471,8.006 61.471,4.704 59.82,4.704
XRSn on Top Layer "XRSN_L01_P009" (solid, pour order 9): 55.375,16.134 56.899,16.134 56.899,4.704 55.375,4.704
+3V3 on Top Layer "+3V3_L01_P008" (solid, pour order 8): 65.535,33.025 73.028,33.025 73.155,33.152 73.155,35.438 65.535,35.438
NetL4_1 on Top Layer "NETL4_1_L01_P007" (solid, pour order 7): 67.186,31.374 70.742,31.374 70.742,27.818 70.615,27.691 68.456,27.691 68.329,27.818 68.329,29.469 68.202,29.596 67.186,29.596
GND on Top Layer "GND_L01_P006" (solid, pour order 6): 69.853,26.675 71.25,26.675 71.631,27.056 72.901,27.056 72.901,29.469 70.996,29.469 70.742,29.215 70.742,27.818 70.615,27.691 69.853,27.691
+12V on Top Layer "+12V_L01_P005" (solid, pour order 5): 71.885,21.849 70.488,21.849 69.98,22.357 68.964,22.357 68.964,23.5 68.329,24.135 68.329,25.659 69.472,25.659 69.853,26.04 70.678,26.04 70.742,25.976 70.742,25.024 71.123,24.643 71.885,24.643
+3V3 on Top Layer "+3V3_L01_P004" (solid, pour order 4): 70.742,26.675 72.901,26.675 72.901,25.278 70.742,25.278
GND on Top Layer "GND_L01_P003" (solid, pour order 3): 67.313,21.849 69.98,21.849 70.615,21.214 71.885,21.214 71.885,19.817 67.313,19.817
GND on Top Layer "GND_L01_P002" (solid, pour order 2): 62.741,9.276 62.233,9.784 62.233,18.801 62.614,19.182 64.138,19.182 64.138,13.594 65.281,12.451 65.281,9.276
Vin-af on Top Layer "VIN-AF_L01_P001" (solid, pour order 1): 74.679,18.928 75.06,18.547 75.06,16.388 74.552,15.88 68.456,15.88 67.948,15.372 67.948,14.102 67.44,13.594 64.519,13.594 64.265,13.848 64.265,18.674 64.519,18.928
VDDIO on PWR "VDDIO_L03_P046" (solid, pour order 46): 36.83,41.91 37.592,41.91 37.973,41.529 37.973,36.322 38.129,36.322 38.383,36.068 44.704,36.068 45.212,35.56 45.212,24.638 44.45,23.876 36.83,23.876 34.781,21.827 34.781,17.289 35.814,16.256 37.338,16.256 37.592,16.51 37.592,18.034 38.1,18.542 42.926,18.542 44.196,17.272 52.578,17.272 52.832,17.526 52.832,26.924 52.324,27.432 50.038,27.432 49.784,27.686 49.784,28.702 50.038,28.956 55.626,28.956 56.134,28.448 56.134,13.97 54.864,12.7 54.855,12.709 34.807,12.709 34.036,11.938 34.036,6.35 33.782,6.096 30.48,6.096 30.226,6.35 30.226,17.526 29.21,18.542 11.176,18.542 10.668,19.05 10.668,23.622 11.176,24.13 20.32,24.13 21.467,25.277 21.467,49.661 22.098,50.292 28.448,50.292 28.956,49.784 28.956,31.75 28.956,27.94 29.464,27.432 32.258,27.432 32.512,27.686 32.512,35.56 33.02,36.068 36.068,36.068 36.322,36.322 36.322,41.402
+3V3 on PWR "+3V3_L03_P045" (solid, remove dead copper, pour order 45): 90.932,63.5 93.98,60.452 93.98,-3.81 -1.524,-3.81 -3.81,-1.524 -3.81,58.166 1.524,63.5
VDDA on PWR "VDDA_L03_P047" (solid, pour order 47): 45.974,42.926 46.482,42.418 46.482,40.386 44.958,38.862 44.958,36.576 44.704,36.322 41.402,36.322 40.894,36.83 40.894,42.418 41.402,42.926
VDD on PWR "VDD_L03_P048" (solid, pour order 48): 51.308,47.244 52.578,45.974 52.578,29.718 52.07,29.21 49.784,29.21 49.53,28.956 49.53,27.686 50.038,27.178 52.324,27.178 52.578,26.924 52.578,18.034 52.07,17.526 44.196,17.526 42.926,18.796 37.846,18.796 37.338,18.288 37.338,17.018 36.83,16.51 35.814,16.51 35.052,17.272 35.052,21.844 36.83,23.622 44.45,23.622 45.466,24.638 45.466,39.37 46.736,40.64 46.736,42.418 45.974,43.18 41.148,43.18 40.64,42.672 40.64,36.576 40.386,36.322 38.608,36.322 38.227,36.703 38.227,41.783 37.846,42.164 36.576,42.164 36.068,41.656 36.068,36.576 35.814,36.322 33.02,36.322 32.258,35.56 32.258,27.94 32.004,27.686 29.464,27.686 29.21,27.94 29.21,46.736 29.718,47.244
+12V on PWR "+12V_L03_P044" (solid, pour order 44): 68.58,24.892 75.946,24.892 76.708,24.13 76.708,10.668 75.582,9.542 68.436,9.542 67.31,10.668 67.31,23.622
GND on GND "GND_L02_P027" (solid, remove dead copper, pour order 27): 1.27,63.5 92.456,63.5 93.98,61.976 93.98,-2.54 92.71,-3.81 -1.778,-3.81 -3.81,-1.778 -3.81,58.674 -2.286,60.198
GND on Bottom Layer "GND_L04_P054" (solid, pour order 54): 36.195,32.131 42.037,32.131 42.037,26.416 36.195,26.416
NetS4_3 on Bottom Layer "NETS4_3_L04_P041" (solid, pour order 41): 11.938,5.842 68.834,5.842 72.39,9.398 75.184,9.398 75.692,8.89 75.692,-1.524 74.422,-2.794 12.192,-2.794 11.938,-2.54
VBUS on Bottom Layer "VBUS_L04_P042" (solid, remove dead copper, pour order 42): 11.684,5.588 8.89,8.382 8.89,15.24 8.128,16.002 2.794,16.002 2.286,15.494 2.286,5.08 5.08,2.286 5.08,-2.54 5.588,-3.048 11.684,-3.048

## Keep-outs
Keep-Out Layer:
  circle w0.254: c90.05,0 r5
  circle w0.254: c90.05,60 r5
  circle w0.254: c0,0 r5
  circle w0.254: c0,60 r5

## Silkscreen, mask and mechanical layers (free items; w line width, h text height)
Top Overlay:
  drawing of 651 lines, arcs and shapes, not listed
  text "GND" at 74.854,52.883 h0.89
  text "GND" at 84.252,52.883 h0.89
  text "STE" at 74.854,45.136 h0.89
  text "CLK" at 84.252,45.136 h0.89
  text "SOMI" at 74.854,42.601 h0.89
  text "SIMO" at 84.252,42.601 h0.89
  text "IO.13" at 74.854,40.061 h0.89
  text "IO.12" at 84.252,40.061 h0.89
  text "IO.11" at 74.854,37.521 h0.89
  text "IO.38" at 84.252,37.521 h0.89
  text "VO_FB" at 84.252,35.129 h0.89
  text "IIN_FB" at 84.252,32.584 h0.89
  text "VIN_FB" at 84.252,30.044 h0.89
  text "IL_FB" at 84.252,27.377 h0.89
  text "EPWM7A" at 86.16,24.694 h0.89
  text "EPWM7B" at 86.16,22.154 h0.89
  text "EPWM1B" at 86.16,19.614 h0.89
  text "EPWM1A" at 86.16,17.074 h0.89
  text "EPWM3A" at 86.16,14.534 h0.89
  text "EPWM3B" at 86.16,11.994 h0.89
  text "+3.3V" at 78.181,11.227 h0.89 r90
  text "GND" at 84.255,9.581 h0.89
  text "GND" at 86.414,6.914 h0.89
  text "Vin" at 78.054,6.528 h0.89 r90
  text "GND" at 84.255,4.628 h0.89
Mechanical 1:
  the board outline again, w0.254